# EAGLE board VCO-8038 (EAGLE 7.2.0)
The 8038 Audio Generator Project An Accurate 20 Hz to 20 kHz Linearly Controlled Audio Generator using ICL8038 http://www.birthofasynth.com/Thomas_Henry/Pages/8038.html
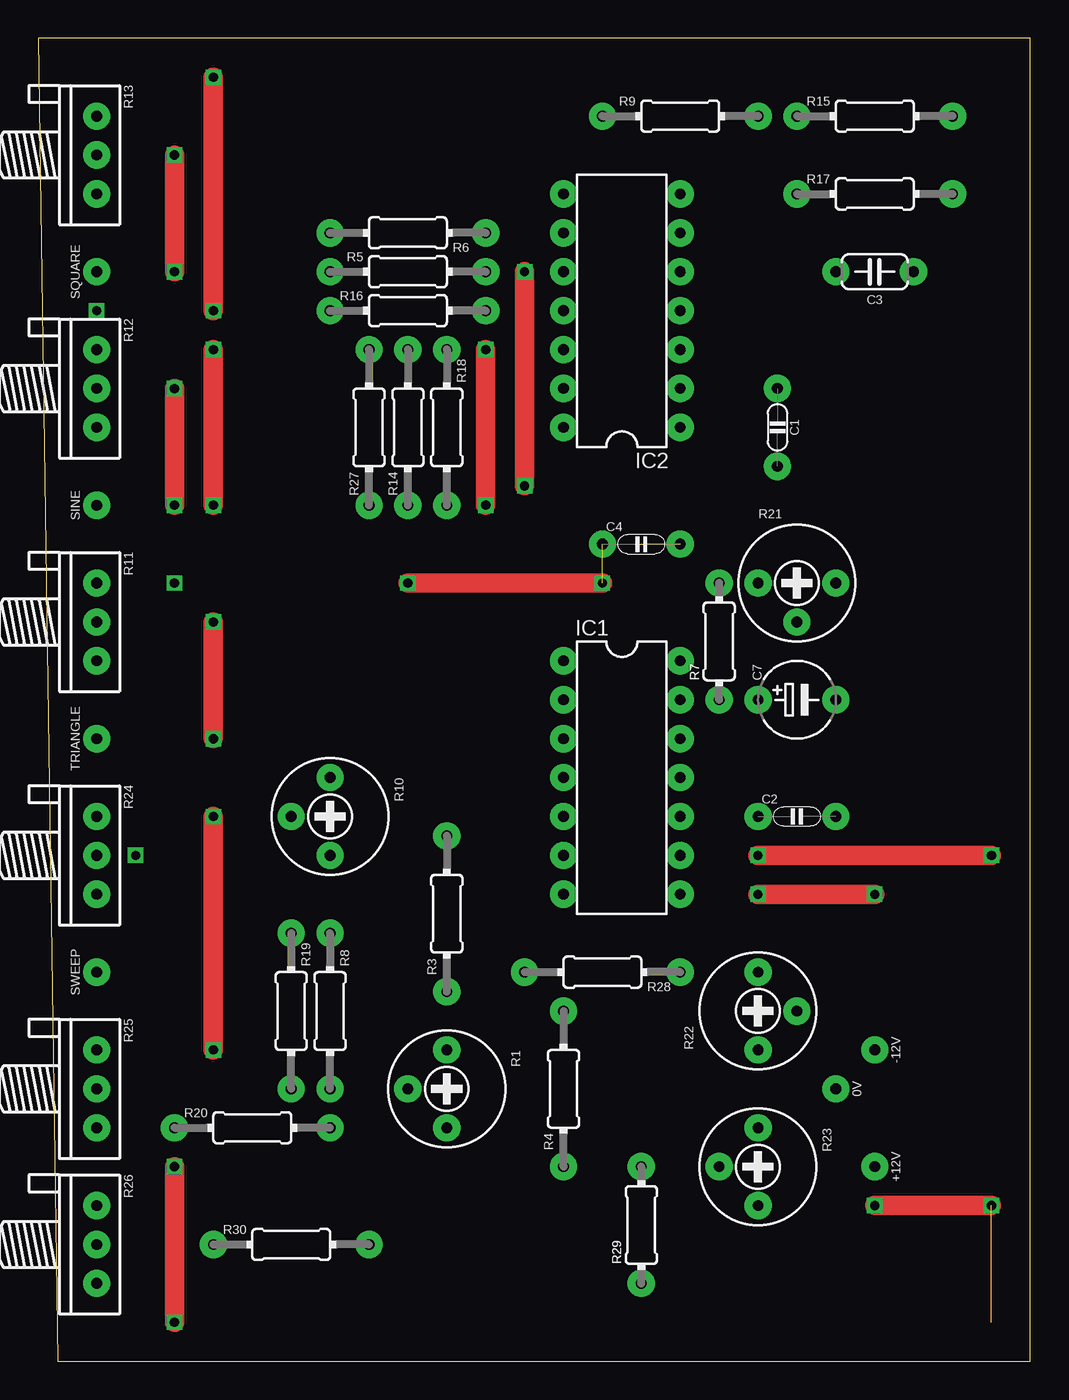
[diagram p0: board, top side]
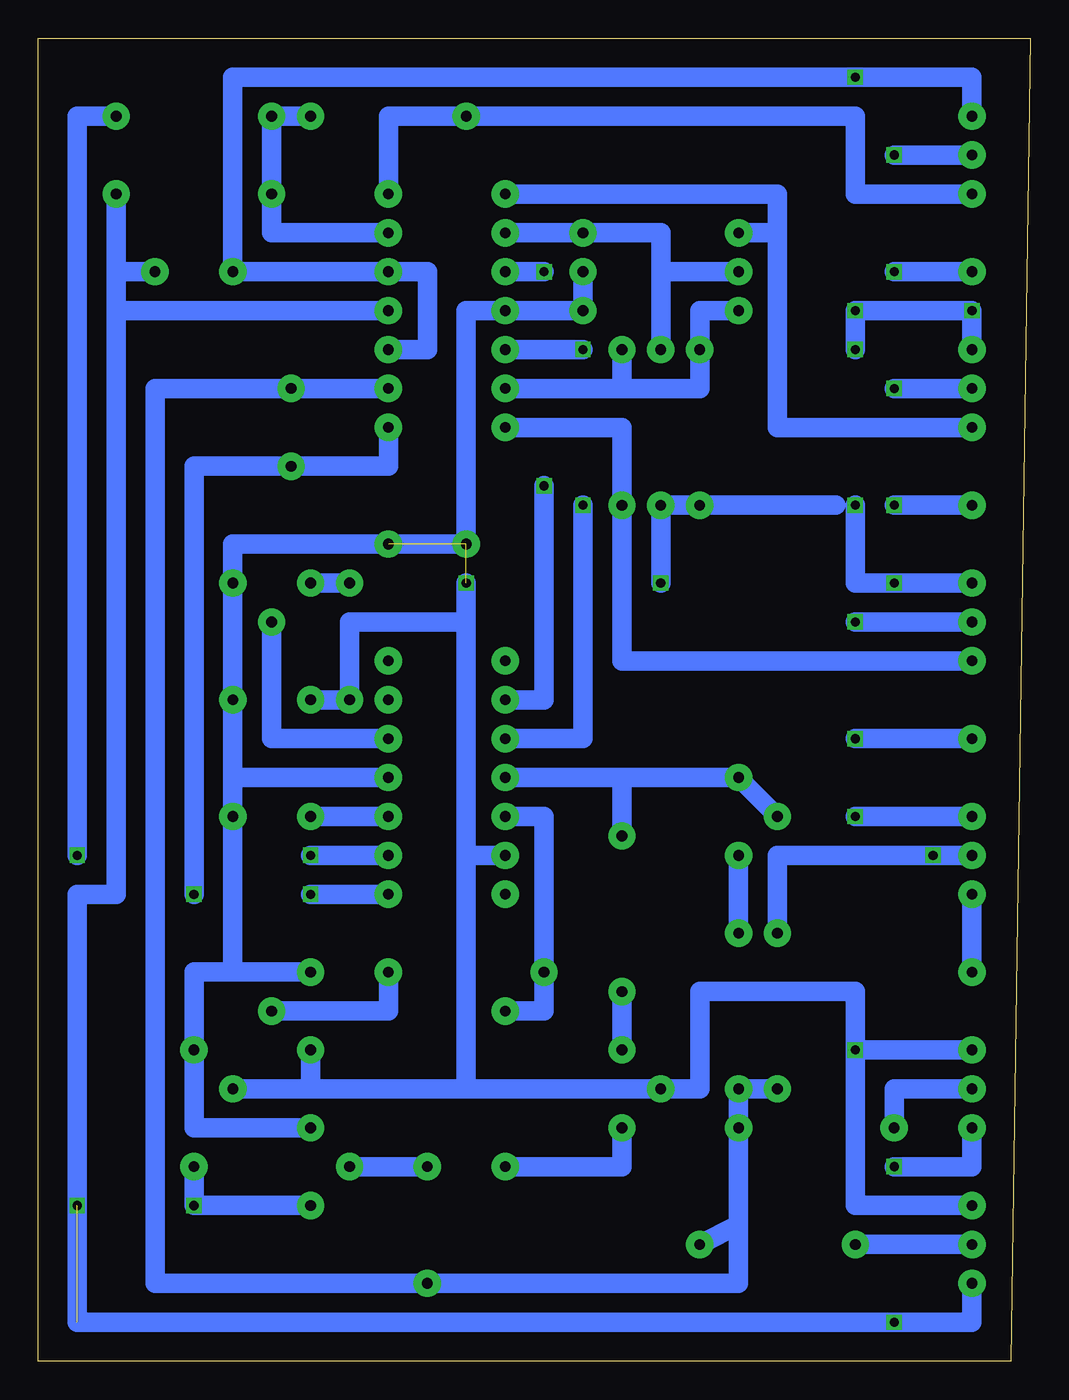
[diagram p1: board, bottom side, seen from below]

Size 64.77 x 86.36 mm. Coordinates in mm from the lower left corner, seen from the top.
Outline: 1.27,0 64.77,0 64.77,86.36 0,86.36 1.27,0
Copper layers (1*16): Top 0.035mm / dielectric 1.5mm / Bottom 0.035mm
Design rules "default": minimum track width 10mil, minimum drill 24mil, track to track 8mil, track to pad 8mil, pad to pad 8mil, via to via 8mil, smd to smd 8mil, copper to edge 40mil, drill to drill 8mil, minimum pad ring 10mil, minimum via ring 8mil, stop-mask expansion 4mil, vias tented up to drill 0mil, thermal gap 10mil

## Footprints (pad centres in the part's own frame; a part is rotated, then mirrored left to right if it is on the bottom)
SPAD = drill 0.7 pad 1.778: 1 0,0
C050-020X036/V = drill 0.7 pad 1.778: 1 0,-2.54; 2 0,2.54
C050-020X036 = drill 0.7 pad 1.778: 1 -2.54,0; 2 2.54,0
C050-024X044 = drill 0.7 pad 1.778: 1 -2.54,0; 2 2.54,0
E5-5/V = drill 0.7 pad 1.778: + 0,2.54; - 0,-2.54
DIL14 = drill 0.7 pad 1.778: 1 -3.81,7.62; 2 -3.81,5.08; 3 -3.81,2.54; 4 -3.81,0; 5 -3.81,-2.54; 6 -3.81,-5.08; 7 -3.81,-7.62; 8 3.81,-7.62; 9 3.81,-5.08; 10 3.81,-2.54; 11 3.81,0; 12 3.81,2.54; 13 3.81,5.08; 14 3.81,7.62
R-TRIM = drill 0.7 pad 1.778: 1 -2.54,0; 2 0,-2.54; 3 2.54,0
0204/10 = drill 0.7 pad 1.778: 1 -5.08,0; 2 5.08,0
0204/7 = drill 0.7 pad 1.778: 1 -3.81,0; 2 3.81,0
POT = drill 0.7 pad 1.778: A -2.54,0; E 2.54,0; S 0,0

## Placement (x,y rotation side)
0V  SPAD  [SPAD]  52.07,17.78 180 top
+12V  SPAD  [SPAD]  54.61,12.7 180 top
-12V  SPAD  [SPAD]  54.61,20.32 180 top
C1  1nF  [C050-020X036/V]  48.26,60.96 180 top
C2  4.7nF  [C050-020X036]  49.53,35.56 0 top
C3  10nF  [C050-024X044]  54.61,71.12 180 top
C4  10nF  [C050-020X036]  39.37,53.34 0 top
C7  4.7μF  [E5-5/V]  49.53,43.18 90 top
IC1  8038  [DIL14]  38.1,38.1 0 top
IC2  TL074_  [DIL14]  38.1,68.58 180 top
R1  1kΩ  [R-TRIM]  26.67,17.78 270 top
R3  1.5kΩ  [0204/10]  26.67,29.21 90 top
R4  1.5kΩ  [0204/10]  34.29,17.78 90 top
R5  5.6kΩ  [0204/10]  24.13,71.12 0 top
R6  10kΩ  [0204/10]  24.13,73.66 180 top
R7  10kΩ  [0204/7]  44.45,46.99 90 top
R8  10kΩ  [0204/10]  19.05,22.86 270 top
R9  10kΩ  [0204/10]  41.91,81.28 0 top
R10  10kΩ  [R-TRIM]  19.05,35.56 270 top
R11  10kΩ  [POT]  3.81,48.26 270 top
R12  10kΩ  [POT]  3.81,63.5 270 top
R13  10kΩ  [POT]  3.81,78.74 270 top
R14  12kΩ  [0204/10]  24.13,60.96 90 top
R15  12kΩ  [0204/10]  54.61,81.28 0 top
R16  24kΩ  [0204/10]  24.13,68.58 0 top
R17  5.6kΩ  [0204/10]  54.61,76.2 0 top
R18  30kΩ  [0204/10]  26.67,60.96 270 top
R19  100kΩ  [0204/10]  16.51,22.86 270 top
R20  100kΩ  [0204/10]  13.97,15.24 0 top
R21  100kΩ  [R-TRIM]  49.53,50.8 0 top
R22  100kΩ  [R-TRIM]  46.99,22.86 90 top
R23  100kΩ  [R-TRIM]  46.99,12.7 270 top
R24  100kΩ  [POT]  3.81,33.02 270 top
R25  100kΩ  [POT]  3.81,17.78 270 top
R26  100kΩ  [POT]  3.81,7.62 270 top
R27  120kΩ  [0204/10]  21.59,60.96 90 top
R28  470kΩ  [0204/10]  36.83,25.4 180 top
R29  10MΩ  [0204/7]  39.37,8.89 90 top
R30  10MΩ  [0204/10]  16.51,7.62 0 top
SINE  SPAD  [SPAD]  3.81,55.88 0 top
SQUARE  SPAD  [SPAD]  3.81,71.12 0 top
SWEEP  SPAD  [SPAD]  3.81,25.4 0 top
TRIANGLE  SPAD  [SPAD]  3.81,40.64 0 top

## Library data of the parts
0V +12V -12V SINE SQUARE SWEEP TRIANGLE = pad
C1-C4 C7 = c
IC1 IC2 = ic
R1 R3-R30 = r

## Nets
GND: 0V.1 C3.2 C4.1 C7.+ IC1.6 IC2.3 IC2.5 R1.2 R7.1 R11.A R12.A R13.A R14.1 R22.1 R24.A R25.A R26.A R27.1
LF_SYMM: R22.2 R28.1
N$1: R23.2 R29.2
N$2: C1.2 IC1.8 IC2.1
N$3: C1.1 IC2.2 R8.2 R19.2 R20.2 R29.1 R30.2
N$4: R26.S R30.1
N$5: R20.1 R25.S
N$6: R19.1 R24.S
N$7: R24.E SWEEP.1
N$8: R8.1 R10.3
N$10: R1.1 R3.1
N$11: R1.3 R4.1
N$12: IC1.4 R3.2 R10.1 R10.2
N$13: IC2.13 R16.1 R18.1 R27.2
N$14: IC1.5 R4.2 R28.2
N$15: IC2.14 R11.E R18.2
N$16: R11.S TRIANGLE.1
N$17: IC1.3 IC2.12
N$18: IC2.9 R5.1 R6.1 R14.2
N$19: IC2.8 R6.2 R12.E
N$20: R12.S SINE.1
N$21: IC1.2 IC2.10
N$22: R7.2 R21.1
N$23: IC1.12 R21.2
N$24: C2.1 IC1.10
N$25: IC2.6 R9.2 R15.1 R17.1
N$26: IC2.7 R9.1 R13.E
N$27: R13.S SQUARE.1
N$29: IC1.9 R15.2
V+: +12V.1 C3.1 IC2.4 R17.2 R23.3 R25.E R26.E
V-: -12V.1 C2.2 C4.2 C7.- IC1.11 IC2.11 R5.2 R16.2 R21.3 R22.3 R23.1

## Tracks (layer width: path | path; a pad name or v marks a point on that pad's centre or on a via)
GND  (via drill 0.6)  (1 unrouted)
  Top 1.27: v11.43,20.32 v11.43,35.56 | v11.43,66.04 v11.43,55.88 | v36.83,50.8 v24.13,50.8 | v11.43,68.58 v11.43,83.82
  Bottom 1.27: C3.2 39.37,71.12 39.37,66.04 IC2.3 | IC2.5 C3.2 | 36.83,17.78 R1.2 21.59,17.78 21.59,24.13 11.43,24.13 v11.43,20.32 | 36.83,48.26 44.45,48.26 R7.1 C7.+ | 36.83,48.26 36.83,33.02 | C3.2 52.07,83.82 v11.43,83.82 3.81,83.82 R13.A | R11.A | R11.A 11.43,50.8 v11.43,55.88 | v11.43,55.88 | v11.43,20.32 R25.A 6.35,20.32 v11.43,20.32 | v11.43,20.32 11.43,10.16 R26.A | R24.A | R12.A v3.81,68.58 v11.43,68.58 v11.43,66.04 | 10.16,35.56 v11.43,35.56 R24.A | IC1.6 36.83,33.02 | 36.83,33.02 36.83,17.78 | 46.99,17.78 0V.1 | 36.83,48.26 v36.83,50.8 | v24.13,50.8 R14.1 R27.1 12.7,55.88 | R22.1 46.99,17.78 | 46.99,17.78 36.83,17.78
  other vias: 24.13,55.88 52.07,17.78 52.07,17.78 8.89,50.8
LF_SYMM
  Bottom 1.27: R22.2 41.91,22.86 R28.1
N$1
  Bottom 1.27: R29.2 R23.2
N$2  (via drill 0.6)
  Top 1.27: v46.99,30.48 v54.61,30.48
  Bottom 1.27: IC2.1 41.91,58.42 C1.2 54.61,58.42 54.61,55.88 v54.61,30.48 | IC1.8 v46.99,30.48
N$3
  Bottom 1.27: IC2.2 C1.1 54.61,63.5 57.15,63.5 57.15,5.08 R29.1 19.05,5.08 19.05,8.89 | R19.2 R8.2 | R8.2 R20.2 | R8.2 19.05,8.89 | R30.2 19.05,8.89
N$4
  Bottom 1.27: R26.S R30.1
N$5
  Bottom 1.27: R20.1 8.89,17.78 R25.S
N$6  (via drill 0.6)
  Bottom 1.27: R24.S v6.35,33.02 16.51,33.02 R19.1
N$7
  Bottom 1.27: SWEEP.1 R24.E
N$8
  Bottom 1.27: R8.1 R10.3
N$10
  Bottom 1.27: R3.1 R1.1
N$11
  Bottom 1.27: R1.3 26.67,12.7 R4.1
N$12
  Bottom 1.27: R10.2 R10.1 26.67,38.1 | R3.2 26.67,38.1 | 26.67,38.1 IC1.4
N$13
  Bottom 1.27: R16.1 21.59,68.58 R27.2 21.59,63.5 26.67,63.5 | IC2.13 26.67,63.5 | 26.67,63.5 R18.1
N$14
  Bottom 1.27: IC1.5 31.75,35.56 R28.2 31.75,22.86 R4.2
N$15
  Bottom 1.27: IC2.14 26.67,60.96 R18.2 26.67,45.72 R11.E
N$16  (via drill 0.6)
  Top 1.27: v11.43,48.26 v11.43,40.64
  Bottom 1.27: R11.S v11.43,48.26 | v11.43,40.64 TRIANGLE.1
N$17  (via drill 0.6)
  Top 1.27: v29.21,55.88 v29.21,66.04
  Bottom 1.27: IC2.12 v29.21,66.04 | IC1.3 29.21,40.64 v29.21,55.88
N$18
  Bottom 1.27: IC2.9 R6.1 24.13,73.66 24.13,71.12 | R14.2 24.13,71.12 | 24.13,71.12 R5.1
N$19
  Bottom 1.27: R12.E 16.51,60.96 16.51,73.66 | IC2.8 16.51,76.2 16.51,73.66 | 16.51,73.66 R6.2
N$20  (via drill 0.6)
  Top 1.27: v8.89,55.88 v8.89,63.5
  Bottom 1.27: SINE.1 v8.89,55.88 | v8.89,63.5 R12.S
N$21  (via drill 0.6)
  Top 1.27: v31.75,71.12 v31.75,57.15
  Bottom 1.27: IC2.10 v31.75,71.12 | v31.75,57.15 31.75,43.18 IC1.2
N$22
  Bottom 1.27: R21.1 R7.2
N$23
  Bottom 1.27: R21.2 49.53,40.64 IC1.12
N$24
  Bottom 1.27: IC1.10 C2.1
N$25
  Bottom 1.27: IC2.6 49.53,73.66 R17.1 R15.1 R9.2
N$26
  Bottom 1.27: IC2.7 41.91,81.28 R9.1 11.43,81.28 11.43,76.2 R13.E
N$27  (via drill 0.6)
  Top 1.27: v8.89,71.12 v8.89,78.74
  Bottom 1.27: SQUARE.1 v8.89,71.12 | v8.89,78.74 R13.S
N$29  (via drill 0.6)
  Top 1.27: v46.99,33.02 v62.23,33.02
  Bottom 1.27: IC1.9 v46.99,33.02 | v62.23,33.02 62.23,81.28 R15.2
V+  (via drill 0.6)  (1 unrouted)
  Top 1.27: v54.61,10.16 v62.23,10.16 | v8.89,12.7 v8.89,2.54
  Bottom 1.27: R23.3 v54.61,10.16 +12V.1 | 59.69,68.58 59.69,30.48 62.23,30.48 62.23,2.54 v8.89,2.54 3.81,2.54 R26.E | R17.2 59.69,71.12 | 59.69,71.12 59.69,68.58 | R25.E 3.81,12.7 v8.89,12.7 | 59.69,68.58 IC2.4 | C3.1 59.69,71.12
V-  (1 unrouted)
  Bottom 1.27: 52.07,38.1 C2.2 52.07,25.4 | 52.07,38.1 C7.- R21.3 52.07,53.34 36.83,53.34 36.83,68.58 IC2.11 R16.2 R5.2 | 52.07,38.1 IC1.11 | 52.07,25.4 R22.3 | R23.1 54.61,15.24 -12V.1 54.61,25.4 52.07,25.4